# Altium PCB PCB1.PcbDoc
Units mil, origin at the board's own origin, x right, y up, seen from the top; angles counter-clockwise.
Board outline 6000 x 4000 mil, 2 copper layers (Top Layer, Bottom Layer); 35 components, 31 nets, 113 pads, 0 vias.
Unrouted connection lines stored in the file: 66.
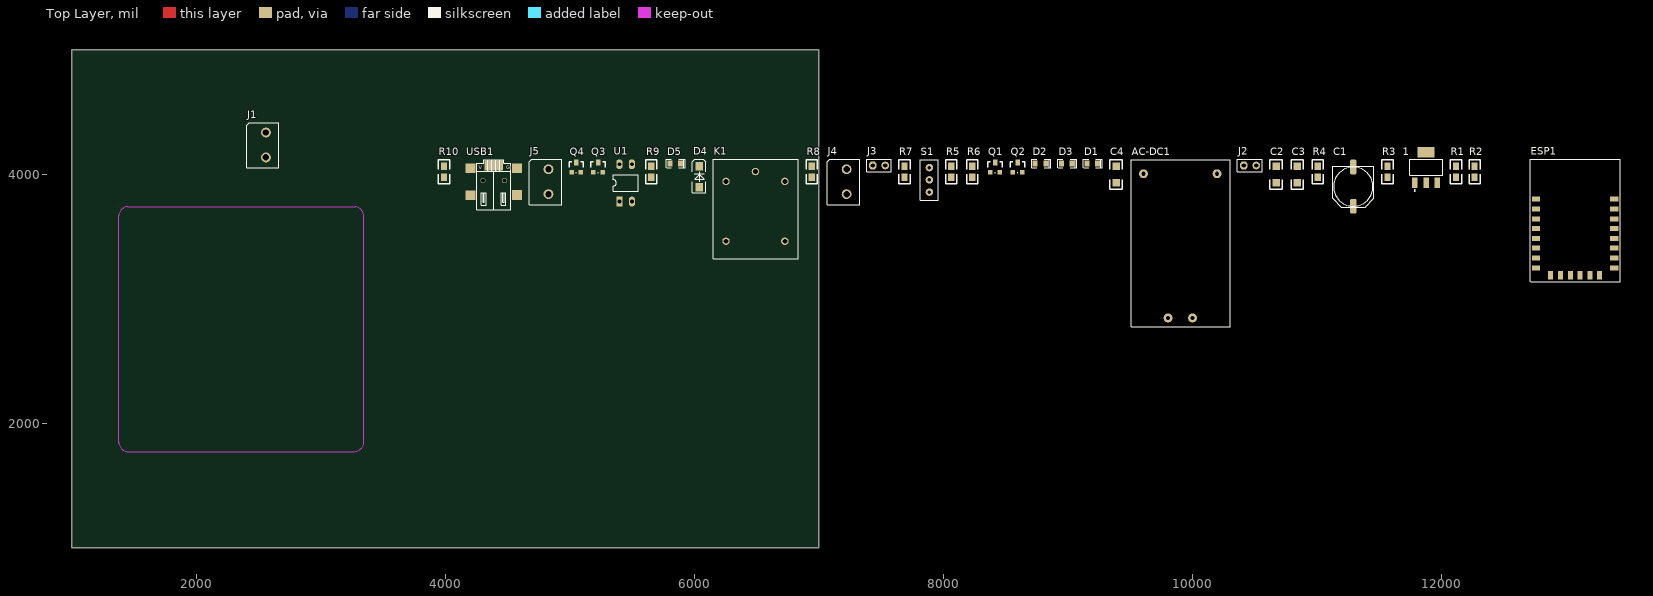
[diagram p0: Top Layer view]
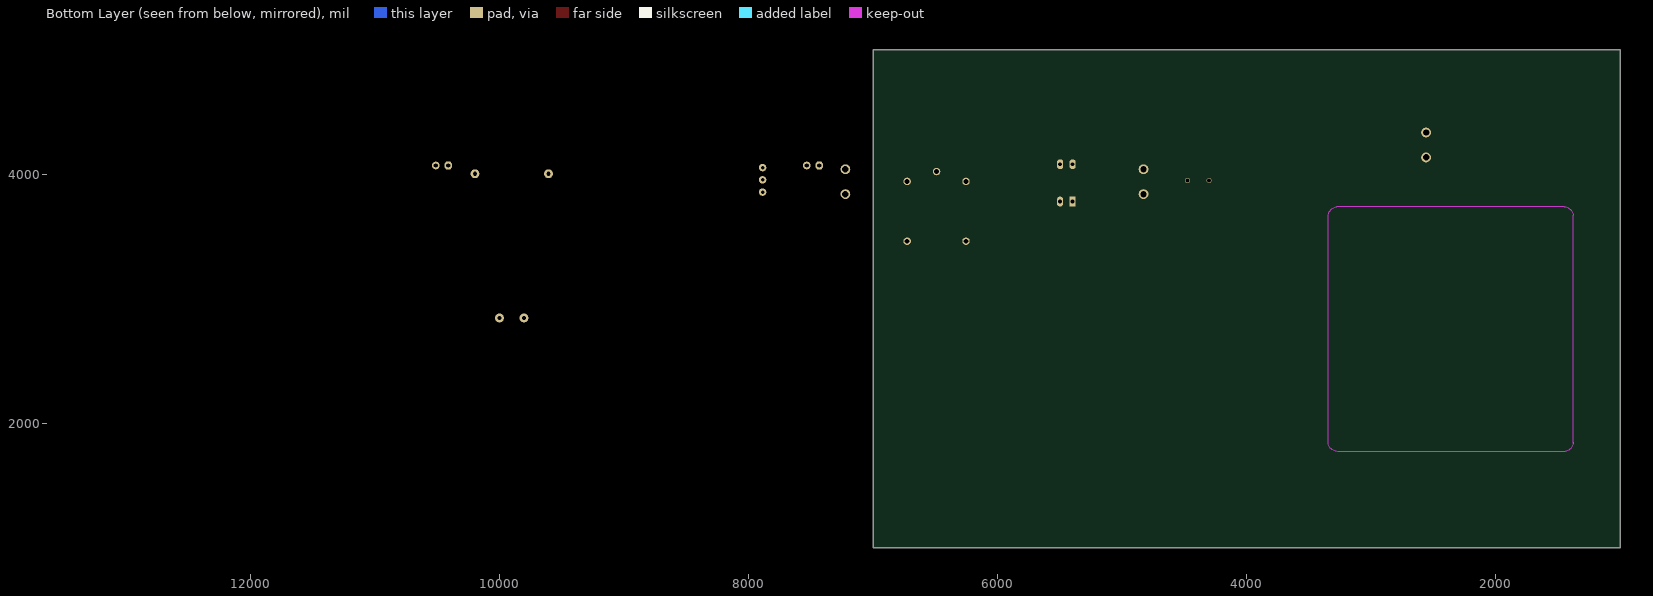
[diagram p1: Bottom Layer view, seen from below]

## Layer stack, top to bottom
Top Solder: solder mask 0.4, Solder Resist, Dk 3.5
Top Layer: signal copper 1.4
Dielectric 1: dielectric 12.6, FR-4, Dk 4.8
Bottom Layer: signal copper 1.4
Bottom Solder: solder mask 0.4, Solder Resist, Dk 3.5

## Board outline
1000,1000 7000,1000 7000,5000 1000,5000

## Design rules (kind name [scope] priority, off if disabled: settings)
Clearance [All] p1: gap=10
PolygonConnect [All] p1: connectstyle=Relief reliefconductorwidth=10 reliefentries=4 polygonreliefangle="90 Angle" airgapwidth=10
RoomDefinition WIFI [InComponentClass('WIFI')] p1: confinementstyle=ConfineIn formatcopy=TRUE lockcomponents=FALSE outline 3930,2765 13450,2765 13450,4230 3930,4230
RoutingVias [All] p1: holewidth=28 width=50 viastyle="Through Hole" minholewidth=28 minwidth=50 maxholewidth=28 maxwidth=50
SolderMaskExpansion [All] p1: expansion=4
Width [All] p1: maxlimit=10 minlimit=10 preferedwidth=10
29 further rules are at their usual default settings.

## Components (designator, comment, footprint, x,y, rotation, side; value= is the part's Value field where it differs from the comment)
1 "AMS1117" SOT223 11880,4055 r0 top
AC-DC1 "220—5" POWER-220_5 9895,3440 r90 top
C1 "Cap" "CAP-E SMD 8X8" 11295,3900 r90 top
C2 "Cap" 1206 10675,3930 r90 top
C3 "Cap" 1206 10845,3930 r90 top
C4 "Cap" 1206 9390,3930 r90 top
D1 "LED0" LED0805 9155,4085 r0 top
D2 "LED0" LED0805 8740,4085 r0 top
D3 "LED0" LED0805 8950,4085 r0 top
D4 "1N5819" DO-214AC/SMA 6040,3980 r90 top
D5 "LED1" LED0805 5805,4085 r0 top
ESP1 "ESP8266-12E" ESP8266 12920,3760 r0 top
J1 "CON2" TML-2-5.08 2085,4025 r90 top
J2 "CON2" HDR1X2 10415,4070 r0 top
J3 "CON2" HDR1X2 7435,4070 r0 top
J4 "CON2" TML-2-5.08 6750,3730 r90 top
J5 "CON2" TML-2-5.08 4355,3730 r90 top
K1 "Relay-SPDT" 5V-5 6315,3980 r0 top
Q1 "SS8050" SOT-23 8380,4015 r0 top
Q2 "SS8050" SOT-23 8560,4015 r0 top
Q3 "SS8050" SOT-23 5190,4015 r0 top
Q4 "SS8050" SOT-23 5015,4015 r0 top
R1 "Res" 0805 12120,3975 r90 top
R2 "Res" 0805 12270,3975 r90 top
R3 "Res" 0805 11570,3975 r90 top
R4 "Res" 0805 11010,3975 r90 top
R5 "Res" 0805 8065,3975 r90 top
R6 "Res" 0805 8235,3975 r90 top
R7 "Res" 0805 7690,3975 r90 top
R8 "Res" 0805 6945,3975 r90 top
R9 "Res" 0805 5655,3975 r90 top
R10 "Res" 0805 3990,3975 r90 top
S1 "SW-SPDT" SS12D00G3 7890,3955 r90 top
U1 "Optoisolator1" DIP4 5400,3780 r90 top
USB1 "USB" USB-MINI 4390,3905 r0 top

## Footprints (in the part's own frame and the unit in brackets; to place one, negate y for a bottom-side part, rotate by r counter-clockwise, add the part's x,y. Pads: shape width x height; smd on the part's side, far side on the other; paste and mask are expansions set on the pad)
5V-5 [mm]
  round 1.524 hole 1: 1(4.5,1.05) 2(-1.5,-0.965) 3(10.5,-0.965) 4(-1.5,-13.17) 5(10.5,-13.17)
  silkscreen extent -4.06,-16.76 13.21,3.56
0805 [mil]
  rect 60x50 smd: 1(0,0) 2(90,0)
  silkscreen extent -50,-45 140,45
1206 [mil]
  rect 60x60 smd: 1(0,0) 2(135,0)
  silkscreen extent -50,-50 185,50
"CAP-E SMD 8X8" [mm]
  rrect50% 3x1.3 smd: 1(-4,0) 2(4,0)
  silkscreen extent -4.2,-4.2 4.2,4.2, body extent -4.52,-4.22 4.48,4.08, height 10.5
DIP4 [mil]
  rect 80x50 hole 32: 1(0,0)
  oval 80x50 hole 32: 2(0,-100) 3(300,-100) 4(300,0)
  silkscreen extent 85,-150 215,50
DO-214AC/SMA [mil]
  rect 70x60 smd: 1(-85,0) 2(85,0)
  silkscreen extent -130,-55 141,55
ESP8266 [mm]
  rect 1.7x1.02 smd: 1(-4,1) 2(-4,-1) 3(-4,-3) 4(-4,-5) 5(-4,-7) 6(-4,-9) 7(-4,-11) 8(-4,-13) 15(12,-13) 16(12,-11) 17(12,-9) 18(12,-7) 19(12,-5) 20(12,-3) 21(12,-1) 22(12,1)
  rect 1.02x1.7 smd: 9(-1,-14.5) 10(1,-14.5) 11(3,-14.5) 12(5,-14.5) 13(7,-14.5) 14(9,-14.5)
  silkscreen extent -5.21,-15.88 13.21,9.14
HDR1X2 [mil]
  oct 62x62 hole 35: 1(0,0)
  round 62 hole 35: 2(100,0)
  silkscreen extent -50,-50 150,50
LED0805 [mil]
  rect 40x50 smd: 1(0,0) 2(85,0)
  silkscreen extent -29,-35 123,35, body extent 3,-24 83,25, height 43
POWER-220_5 [mm]
  round 1.8 hole 0.9: 1(-15.113,-2.762) 2(-15.113,2.238) 3(14.307,-7.762) 4(14.307,7.238)
  silkscreen extent -16.89,-10.41 17.14,9.78
SOT223 [mm] "SOT-223/SC-73; 4 Leads; Body 6.7 x 7.3 mm, inc. leads (LxW max)"
  rect 1.1x2.15 smd: 1(-2.3,-3.1) 2(0,-3.1) 3(2.3,-3.1)
  rect 3.5x2.15 smd: 4(0,3.1)
  silkscreen extent -3.35,-4.85 3.35,1.63
SOT-23 [mil]
  rect 36x36 smd: 1(0,0) 2(75,0)
  rect 36x50 smd: 3(38,80)
  silkscreen extent -20,-5 95,85
SS12D00G3 [mil]
  round 60 hole 27.56: 1(-98.43,0) 2(0,0) 3(98.43,0)
  silkscreen extent -165,-70 161,75
TML-2-5.08 [mm]
  round 2 hole 1.3: 1(2.794,-12.065) 2(7.874,-12.065)
  silkscreen extent 0.64,-14.73 9.91,-8.13
USB-MINI [mm]
  rect 2x2 smd: 0(-4.746,-1.872) 0(-4.746,3.612)
  round 1 hole 0.8: 0(-2.2,1.128) 0(2.2,1.128)
  rect 2x2.032 smd: 0(4.746,-1.872) 0(4.746,3.628)
  rect 0.52x2 smd: 1(-1.626,4.166) 2(-0.813,4.166) 3(0,4.166) 4(0.813,4.166) 5(1.626,4.166)
  silkscreen extent -3.5,-4.87 3.5,5.38, body extent -5.32,-4.63 5.38,4.57, height 3.95

## Part data
C1 C2 C3 C4: "Capacitor"
D1 D2 D3: "Typical INFRARED GaAs LED"
D4: library part Diode, "Default Diode"
D5: "Typical RED GaAs LED"
ESP1: library part ESP8266
J1 J2 J3 J4 J5: "Connector"
K1: "Single-Pole Dual-Throw Relay"
Q1 Q2 Q3 Q4: library part 2N3904, "NPN General Purpose Amplifier"
R1 R2 R3 R4 R5 R6 R7 R8 R9 R10: "Resistor"
S1: "SPDT Subminiature Toggle Switch, Right Angle Mounting, Vertical Actuation"
U1: "4-Pin Phototransistor Optocoupler"
USB1: library part miniUSB-b

## Nets (pads, with @x,y where several pads share a name; then routed paths per layer and width w, separated by ;. In a path a pad name is that pad's centre, name@x,y a point inside that pad or via, vN(x,y) a via of type N, cw(c..) or ccw(c..) an arc to the next point about the centre after c; other vN are vias at no path point)
220L: AC-DC1.1 J1.2 J5.2 K1.1
220L_OUT: J3.2 J4.1 K1.5
220N: AC-DC1.2 J1.1 J4.2
ADC: ESP1.1
GND: 1.1 AC-DC1.4 C1.1 C2.2 C3.2 C4.2 D1.2 ESP1.15 ESP1.16 J2.1 Q1.2 Q2.2 Q3.2 Q4.2 R5.1 R6.1 R10.1 USB1.5
IO0: ESP1.18 J2.2
IO2: ESP1.17
IO4: ESP1.19
IO5: ESP1.20 Q4.1 R10.2
IO12: ESP1.6 Q2.1 R6.2
IO13: ESP1.7
IO14: ESP1.5 Q1.1 R5.2
IO16: ESP1.4
NetD1_1: D1.1 R3.1
NetD2_1: D2.1 R1.2
NetD2_2: D2.2 Q1.3
NetD3_1: D3.1 R2.2
NetD3_2: D3.2 Q2.3
NetD4_1: D4.1 D5.2 K1.2 Q3.3
NetD5_1: D5.1 R7.2
NetESP1_3: ESP1.3 ESP1.8 S1.3
NetESP1_21: ESP1.21 R4.1
NetQ3_2: Q3.1 U1.3
NetQ4_3: Q4.3 R9.1 U1.2
NetR8_1: R8.1 U1.1
OTHER_OUT: J3.1 J5.1
RST: ESP1.2
RXD: R4.2 USB1.3
TXD: ESP1.22 USB1.2
VCC_3.3V: 1.2 C2.1 C3.1 R1.1 R2.1 R3.2 R8.2 R9.2 S1.2
VCC_5V: 1.3 AC-DC1.3 C1.2 C4.1 D4.2 K1.3 R7.1 U1.4 USB1.1
pads on no net: 1.4 ESP1.9 ESP1.10 ESP1.11 ESP1.12 ESP1.13 ESP1.14 K1.4 S1.1 USB1.0 USB1.4

## Keep-outs
Keep-Out Layer:
  lines w5: 1377.95,1837.05 1377.95,3670 cw(c1456.21,3661.28) 1451.21,3739.86 ; 1377.95,1845 ccw(c1456.53,1850) 1447.82,1771.74 ; 1443.35,1771.65 3271.65,1771.65 ccw(c3268.4,1850.33) 3346.66,1841.61 ; 1451.21,3740.16 3276.45,3740.16 ; 3276.45,3740.28 cw(c3267.73,3662.03) 3346.46,3663.54 3346.46,1841.61

## Text inside footprints (layer, text, board x,y; h text height)
USB1: Top Overlay "G" at 4489,4040 h30; Top Overlay "V" at 4270,4040 h30